# Altium PCB PCB1_w_gnd_plane.PcbDoc (part 2 of 2)
Units mm, origin at the board's own origin, x right, y up, seen from the top; angles counter-clockwise.
Board outline 64 x 64 mm, 2 copper layers (Top Layer, Bottom Layer), stack 1.601 mm thick; 71 components, 44 nets, 225 pads, 49 vias.
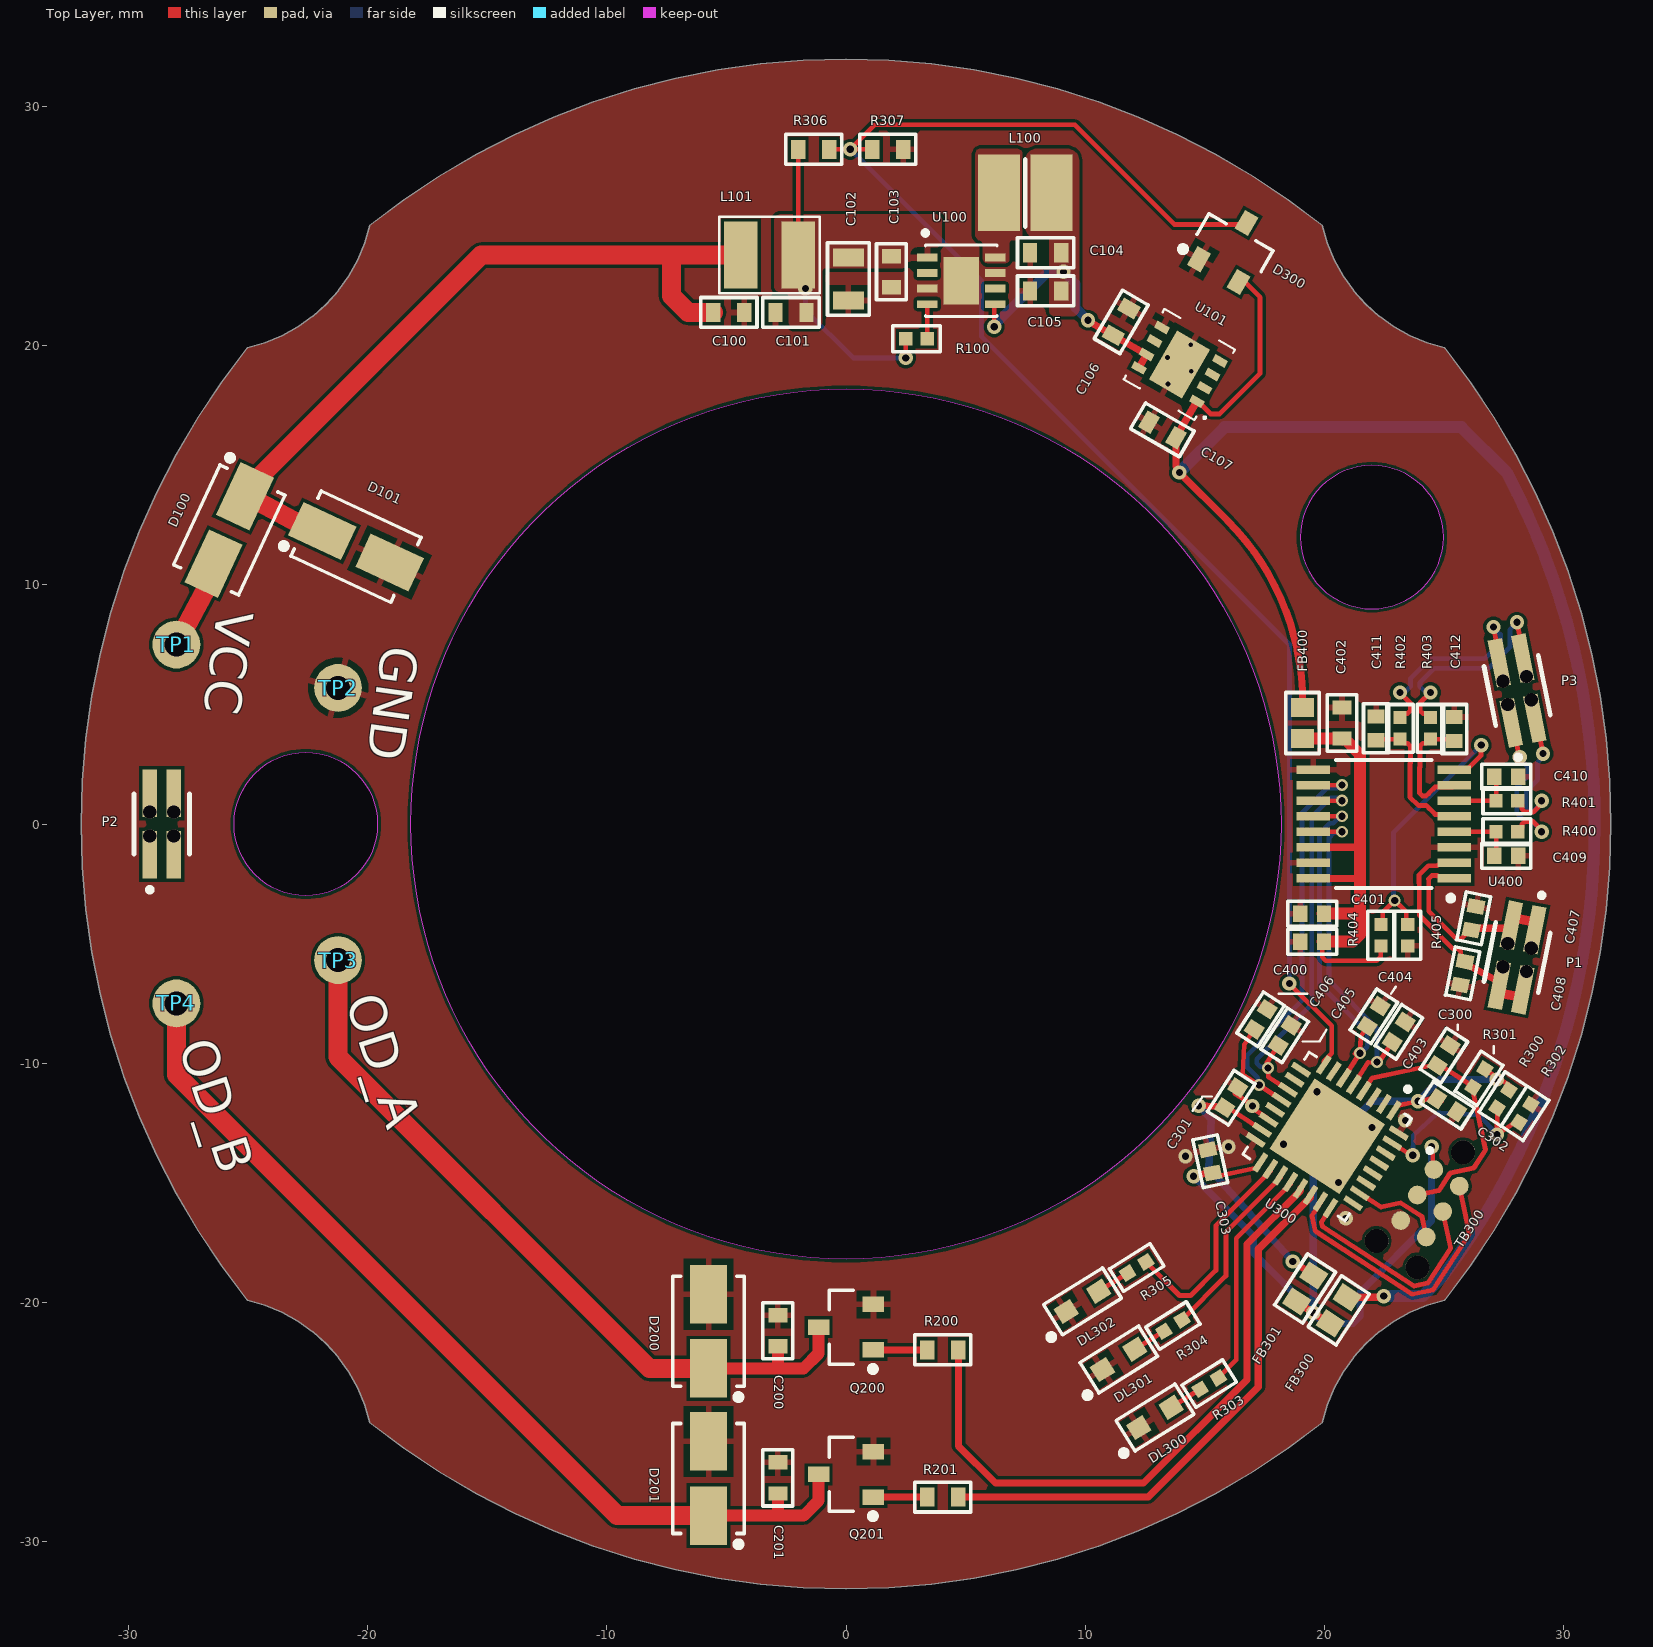
[diagram p0: Top Layer view]

## Silkscreen, mask and mechanical layers (free items; w line width, h text height) (continued)
Mechanical 1: (continued)
  lines w0.5: -32,0 -31.95,-1.792 -31.799,-3.579 -31.549,-5.354 -31.2,-7.112 -30.752,-8.848 -30.209,-10.557 -29.57,-12.232 -28.839,-13.868 -28.017,-15.462 -27.107,-17.006 -26.112,-18.498 -25.035,-19.931 -24.303,-20.14 -23.599,-20.429 -22.932,-20.797 -22.311,-21.237 -21.744,-21.744 -21.237,-22.311 -20.797,-22.932 -20.43,-23.599 -20.14,-24.303 -19.931,-25.035 -18.498,-26.112 -17.006,-27.107 -15.462,-28.017 -13.868,-28.839 -12.232,-29.57 -10.557,-30.209 -8.848,-30.752 -7.112,-31.2 -5.354,-31.549 -3.579,-31.799 -1.792,-31.95 0,-32 1.792,-31.95 3.578,-31.799 5.354,-31.549 7.112,-31.2 8.848,-30.752 10.556,-30.209 12.232,-29.57 13.868,-28.839 15.462,-28.017 17.006,-27.107 18.498,-26.112 19.931,-25.035 20.14,-24.303 20.429,-23.599 20.797,-22.932 21.237,-22.311 21.744,-21.744 22.311,-21.237 22.932,-20.797 23.599,-20.429 24.303,-20.14 25.035,-19.931 26.112,-18.498 27.107,-17.006 28.017,-15.462 28.839,-13.868 29.57,-12.232 30.209,-10.557 30.752,-8.848 31.2,-7.112 31.549,-5.354 31.799,-3.579 31.95,-1.792 32,0 31.95,1.792 31.799,3.579 31.549,5.354 31.2,7.112 30.752,8.848 30.209,10.557 29.57,12.232 28.839,13.868 28.017,15.462 27.107,17.006 26.112,18.498 25.035,19.931 24.303,20.14 23.599,20.429 22.932,20.797 22.311,21.237 21.744,21.744 21.237,22.311 20.797,22.932 20.429,23.599 20.14,24.303 19.931,25.035 18.498,26.112 17.006,27.107 15.462,28.017 13.868,28.839 12.232,29.57 10.556,30.209 8.848,30.752 7.112,31.2 5.354,31.549 3.578,31.799 1.792,31.95 0,32 -1.792,31.95 -3.579,31.799 -5.354,31.549 -7.112,31.2 -8.848,30.752 -10.557,30.209 -12.232,29.57 -13.868,28.839 -15.462,28.017 -17.006,27.107 -18.498,26.112 -19.931,25.035 -20.14,24.303 -20.43,23.599 -20.797,22.932 -21.237,22.311 -21.744,21.744 -22.311,21.237 -22.932,20.797 -23.599,20.429 -24.303,20.14 -25.035,19.931 -26.112,18.498 -27.107,17.006 -28.017,15.462 -28.839,13.868 -29.57,12.232 -30.209,10.557 -30.752,8.848 -31.2,7.112 -31.549,5.354 -31.799,3.579 -31.95,1.792 -32,0

## Text inside footprints (layer, text, board x,y; h text height)
U400: Mechanical 17 "*" at 24.684,-1.206 h1.27 r180; Top Assembly "*" at 24.684,-1.206 h1.27 r180